# Altium PCB PCB1.PcbDoc
Units mm, origin at the board's own origin, x right, y up, seen from the top; angles counter-clockwise.
Board outline 26 x 58 mm, 2 copper layers (Top Layer, Bottom Layer); 25 components, 58 nets, 176 pads, 88 vias.
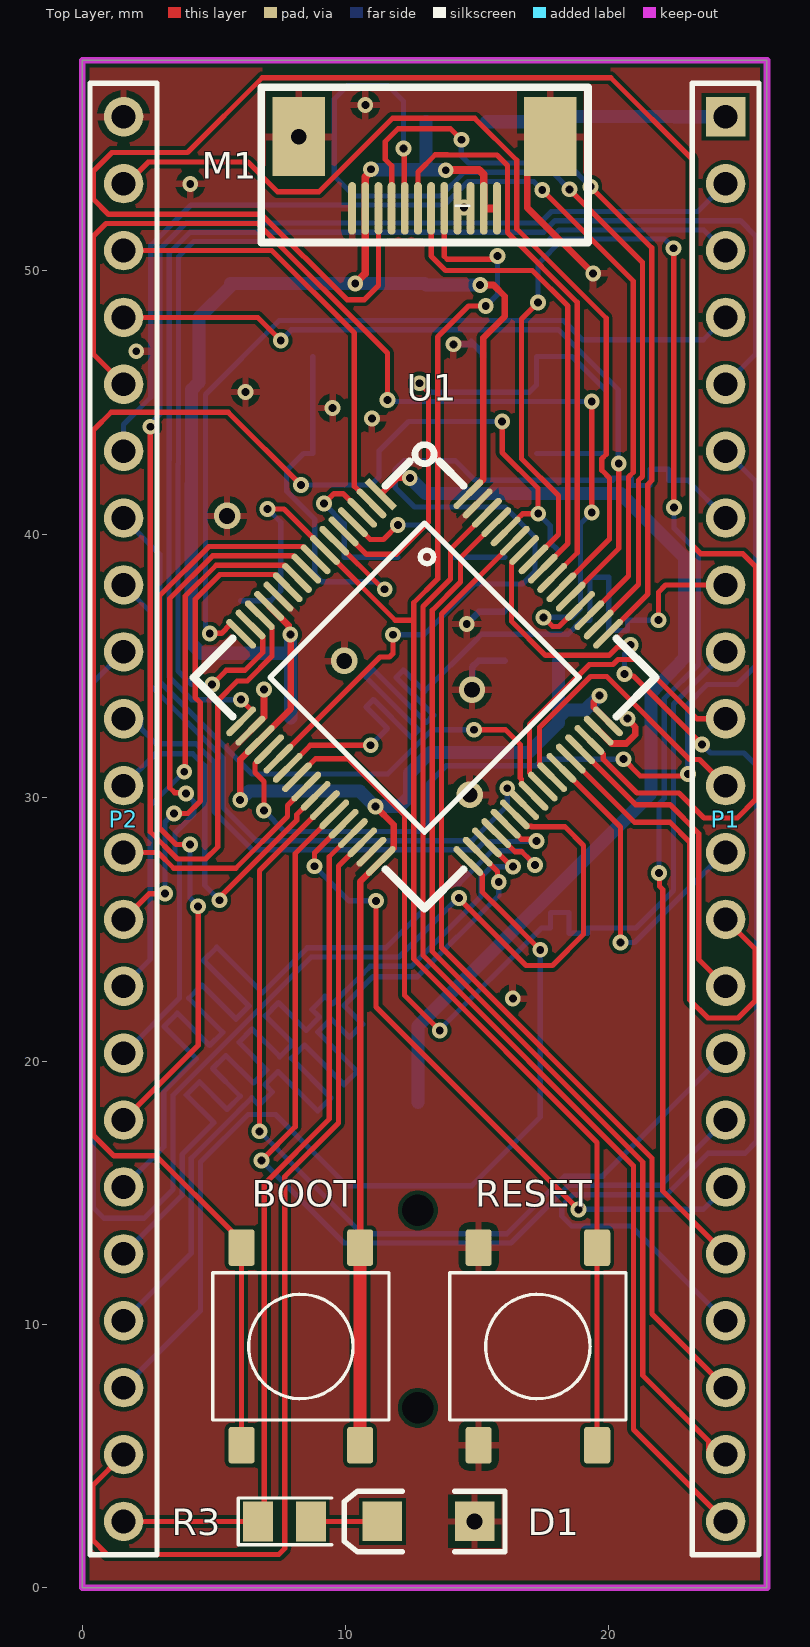
[diagram p0: Top Layer view]
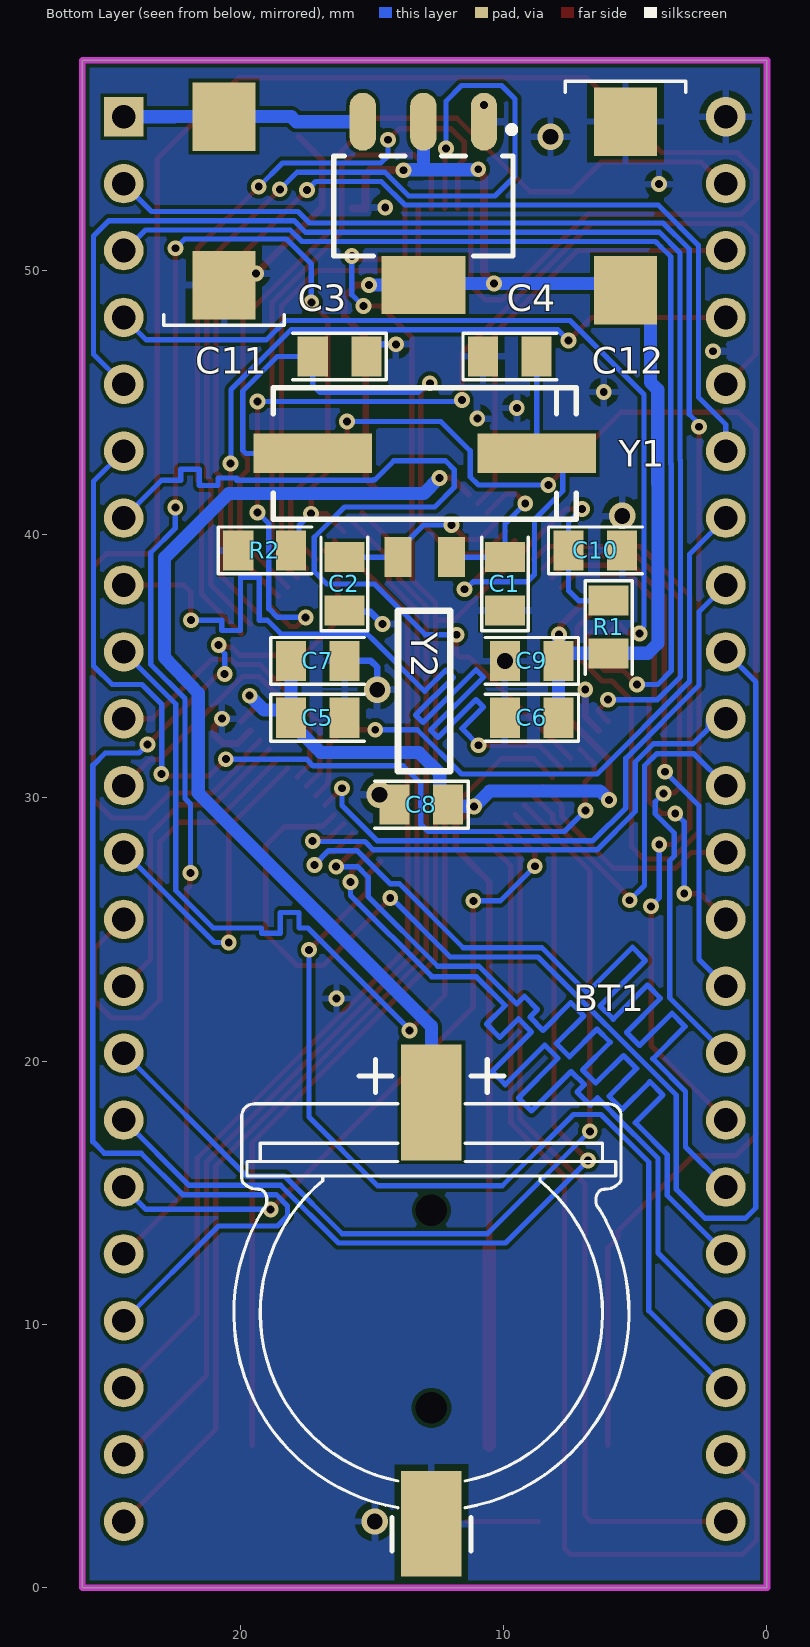
[diagram p1: Bottom Layer view, seen from below]
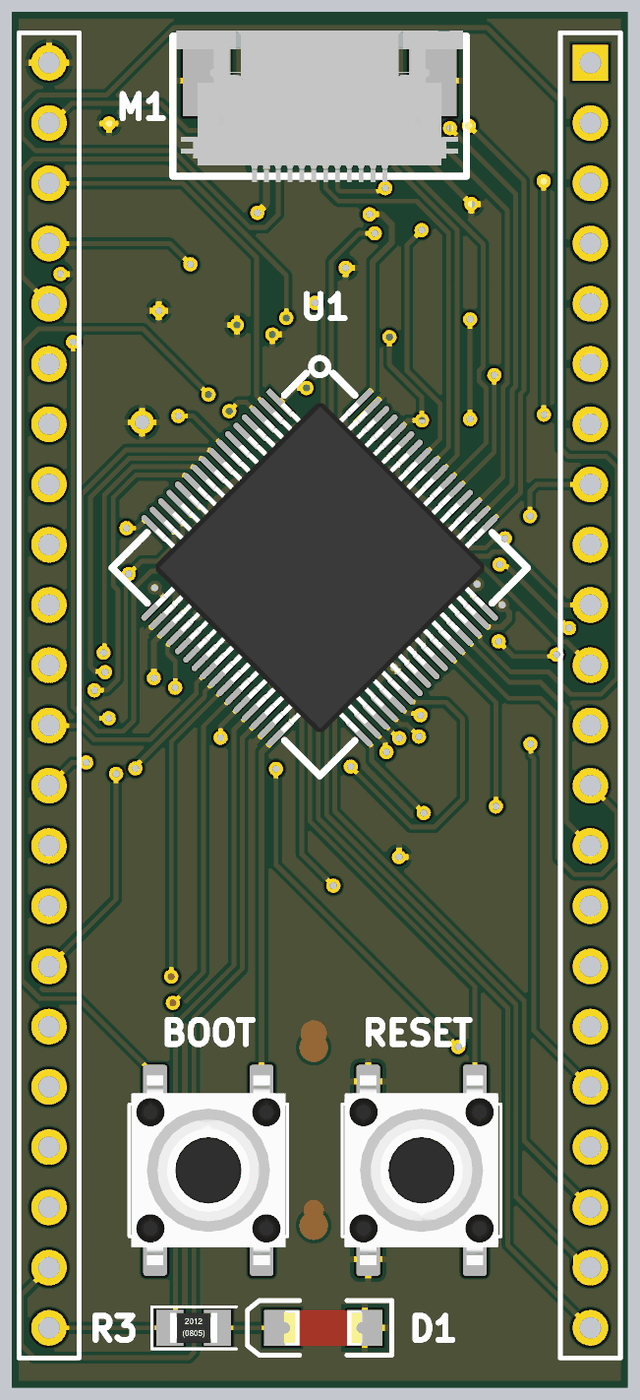
[diagram p2: 3D render of the assembled board from above, using the file's embedded part models]
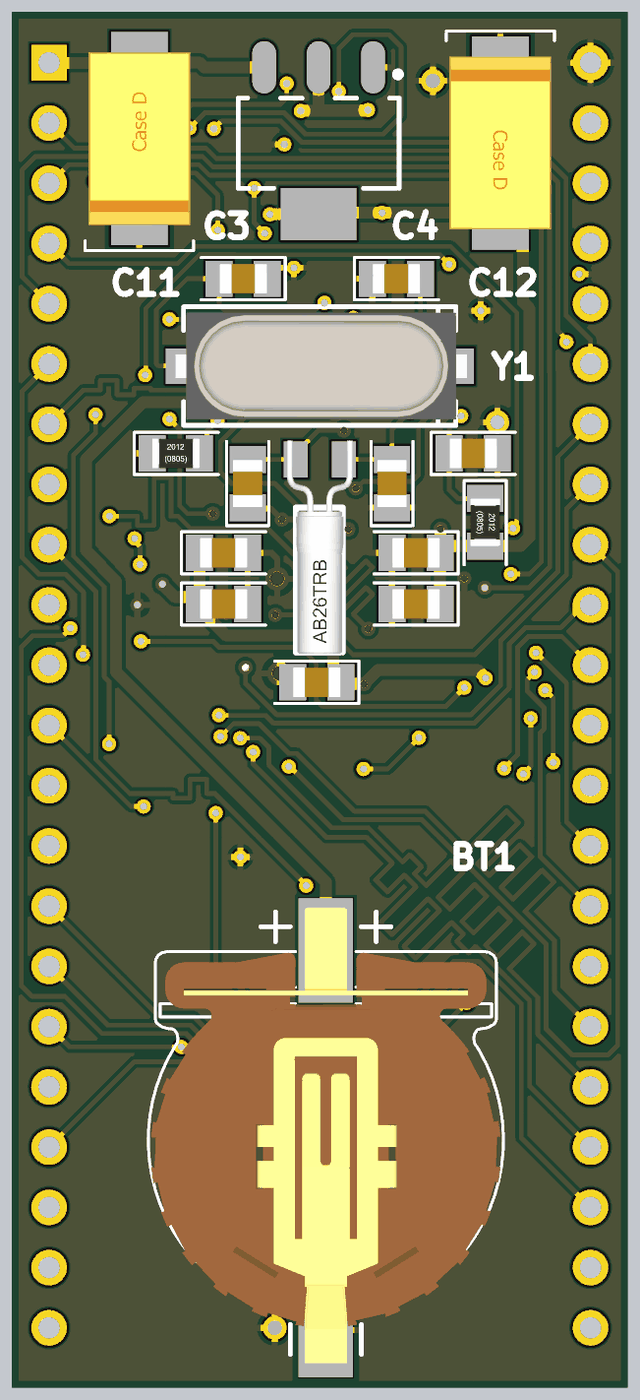
[diagram p3: 3D render of the assembled board from below, using the file's embedded part models]

## Layer stack, top to bottom
Top Solder: solder mask 0.0102, Solder Resist, Dk 3.5
Top Layer: signal copper 0.0356
Dielectric 1: dielectric 0.32, FR-4, Dk 4.8
Bottom Layer: signal copper 0.0356
Bottom Solder: solder mask 0.0102, Solder Resist, Dk 3.5

## Board outline
0,0 0,58 26,58 26,0

## Design rules (kind name [scope] priority, off if disabled: settings)
Clearance [All] p1: gap=0.15 ignorepadtopadclearanceinfootprint=TRUE
MatchedLengths SPI2 [InNetClass('SPI2')] p1: tolerance=25.4 checknetsindiffpair=FALSE checkdiffpairvsdiffpair=TRUE checkxsignals=TRUE checkothers=TRUE usedelayunits=TRUE delaytolerance=5.000000
MatchedLengths [InNetClass('SPI1')] p2: tolerance=25.4 checknetsindiffpair=FALSE checkdiffpairvsdiffpair=TRUE checkxsignals=TRUE checkothers=TRUE usedelayunits=TRUE delaytolerance=5.000000
PolygonConnect [All] p1: connectstyle=Relief reliefconductorwidth=0.254 reliefentries=4 polygonreliefangle="90 Angle" airgapwidth=0.254
RoutingVias [All] p1: holewidth=0.3 width=0.6 viastyle="Through Hole" minholewidth=0.3 minwidth=0.6 maxholewidth=0.7 maxwidth=1.5
SMDNeckDown [All] p1: percent=100.000
SolderMaskExpansion [All] p1: expansion=0.102 istentingtop=FALSE
Width Width_Power [InNetClass('Power')] p1: maxlimit=2 minlimit=0.25 preferedwidth=0.5 minimp=50.000000 maximp=50.000000 favimp=50.000000
Width [All] p2: maxlimit=1 minlimit=0.15 preferedwidth=0.2 minimp=50.000000 maximp=50.000000 favimp=50.000000
30 further rules are at their usual default settings.

## Classes and differential pairs
net class SPI2: PB12 PB13 PB14 PB15
net class SPI1: PA4 PA5 PA6 PA7
net class Power: +3.3v +5v GND NetBT1_1

## Components (designator, comment, footprint, x,y, rotation, side; value= is the part's Value field where it differs from the comment)
BOOT "TS-1143S-WP" TS-1143S 8.298,9.16 r90 top
BT1 "BAT3V3" "Battery socket SMD" 12.743,10.429 r90 bottom
C1 "10pF" "0805 C"#1 9.949,37.1 r90 bottom
C2 "10pF" "0805 C"#1 16.045,37.1 r90 bottom
C3 "22pF" "0805 C"#1 15.215,46.752 r0 bottom
C4 "22pF" "0805 C"#1 10.779,46.752 r180 bottom
C5 "100nF" "0805 C"#1 18.077,33.036 r180 bottom
C6 "100nF" "0805 C"#1 7.917,33.036 r0 bottom
C7 "100nF" "0805 C"#1 18.077,35.195 r180 bottom
C8 "100nF" "0805 C"#1 12.108,29.734 r0 bottom
C9 "100nF" "0805 C"#2 7.917,35.195 r0 bottom
C10 "100nF" "0805 C"#1 7.536,39.386 r180 bottom
C11 "Tantalium Cap" "TANTAL-CAP-Size D" 20.618,52.661 r90 bottom
C12 "Tantalium Cap" "TANTAL-CAP-Size D" 5.376,52.473 r270 bottom
D1 "SMD 1206 LED" "LED 1206" 13.147,2.517 r180 top
M1 "FPC 12 Pin 0.5mm Pitch" "FPC 12 Pin 0.5mm Pitch" 12.997,53.737 r0 top
P1 "MHDR_1X22" HDR1X22#1 24.427,55.857 r270 top
P2 "MHDR_1X22" HDR1X22#2 1.567,2.517 r90 top
R1 "4.7K" "0805 R" 6.012,37.481 r270 bottom
R2 "10K" "0805 R" 20.077,39.386 r180 bottom
R3 "200" "0805 R" 6.679,2.517 r0 top
RESET "TS-1143S-WP" TS-1143S 17.298,9.16 r270 top
U1 "STM32F103RCT6" LQFP-64 12.997,34.56 r315 top
Y1 "16 MHz" "Xtal SMD" 12.997,43.069 r0 bottom
Y2 "11.0592 MHz" "Xtal 32.782khz" 12.997,39.132 r270 bottom

## Footprints (in the part's own frame and the unit in brackets; to place one, negate y for a bottom-side part, rotate by r counter-clockwise, add the part's x,y. Pads: shape width x height; smd on the part's side, far side on the other; paste and mask are expansions set on the pad)
"0805 C"#1 [mil]
  rect 45x60 smd: 1(0,0) 2(80,0)
  silkscreen extent -30,-35 110,35, body extent 1,-25 79,25, height 39
"0805 C"#2 [mil]
  rect 45x60 smd: 1(0,0)
  rect 45x60 smd mask+4: 2(80,0)
  silkscreen extent -30,-35 110,35, body extent 1,-25 79,25, height 39
"0805 R" [mil]
  rect 45x60 smd: 1(0,0) 2(78.74,0)
  silkscreen extent -30,-35 110,35, body extent 0,-25 79,25, height 18
"Battery socket SMD" [mm]
  rect 4.4x2.3 smd mask+0.05: 1(8,0)
  rect 4x2.3 smd mask+0.05: 2(-8,0)
  round 0.5 hole 1.2 unplated mask+0.05: ""(-3.6,0) ""(3.9,0)
  silkscreen extent -9.02,-7.5 9.63,7.5, body extent -9.4,-7.37 9.8,7.37, height 4.25
"FPC 12 Pin 0.5mm Pitch" [mm]
  oval 0.3x2 smd mask+0.04: 1(-2.751,-1.36) 2(-2.251,-1.36) 3(-1.751,-1.36) 4(-1.251,-1.36) 5(-0.751,-1.36) 6(-0.251,-1.36) 7(0.249,-1.36) 8(0.749,-1.36) 9(1.249,-1.36) 10(1.749,-1.36) 11(2.249,-1.36) 12(2.749,-1.36)
  rect 2x3 smd: 13(4.774,1.361) 14(-4.774,1.361)
  silkscreen extent -6.2,-2.66 6.2,3.24, body extent -6.05,-2.91 6.05,3.49, height 2
HDR1X22#1 [mm] "Connector; Header; 22 Position"
  rect 1.5x1.5 hole 0.9: 1(0,0)
  round 1.5 hole 0.9: 2(2.54,0) 3(5.08,0) 4(7.62,0) 5(10.16,0) 6(12.7,0) 7(15.24,0) 8(17.78,0) 9(20.32,0) 10(22.86,0) 11(25.4,0) 12(27.94,0) 13(30.48,0) 14(33.02,0) 15(35.56,0) 16(38.1,0) 17(40.64,0) 18(43.18,0) 19(45.72,0) 20(48.26,0) 21(50.8,0) 22(53.34,0)
  silkscreen extent -1.27,-1.27 54.61,1.27
HDR1X22#2 [mm] "Connector; Header; 22 Position"
  round 1.5 hole 0.9: 1(0,0) 2(2.54,0) 3(5.08,0) 4(7.62,0) 5(10.16,0) 6(12.7,0) 7(15.24,0) 8(17.78,0) 9(20.32,0) 10(22.86,0) 11(25.4,0) 12(27.94,0) 13(30.48,0) 14(33.02,0) 15(35.56,0) 16(38.1,0) 17(40.64,0) 18(43.18,0) 19(45.72,0) 20(48.26,0) 21(50.8,0) 22(53.34,0)
  silkscreen extent -1.27,-1.27 54.61,1.27
"LED 1206" [mm]
  rect 1.5x1.5 smd: 1(-1.75,0) 2(1.75,0)
  silkscreen extent -2.9,-1.15 3.2,1.15, body extent -1.65,-0.72 1.65,0.73, height 1.36
LQFP-64 [mm]
  rect 1.5x0.25 smd mask+0.05: 1(-6.1,3.75)
  oval 1.5x0.25 smd mask+0.05: 2(-6.1,3.25) 3(-6.1,2.75) 4(-6.1,2.25) 5(-6.1,1.75) 6(-6.1,1.25) 7(-6.1,0.75) 8(-6.1,0.25) 9(-6.1,-0.25) 10(-6.1,-0.75) 11(-6.1,-1.25) 12(-6.1,-1.75) 13(-6.1,-2.25) 14(-6.1,-2.75) 15(-6.1,-3.25) 16(-6.1,-3.75) 33(6.1,-3.75) 34(6.1,-3.25) 35(6.1,-2.75) 36(6.1,-2.25) 37(6.1,-1.75) 38(6.1,-1.25) 39(6.1,-0.75) 40(6.1,-0.25) 41(6.1,0.25) 42(6.1,0.75) 43(6.1,1.25) 44(6.1,1.75) 45(6.1,2.25) 46(6.1,2.75) 47(6.1,3.25) 48(6.1,3.75)
  oval 0.25x1.5 smd mask+0.05: 17(-3.75,-6.1) 18(-3.25,-6.1) 19(-2.75,-6.1) 20(-2.25,-6.1) 21(-1.75,-6.1) 22(-1.25,-6.1) 23(-0.75,-6.1) 24(-0.25,-6.1) 25(0.25,-6.1) 26(0.75,-6.1) 27(1.25,-6.1) 28(1.75,-6.1) 29(2.25,-6.1) 30(2.75,-6.1) 31(3.25,-6.1) 32(3.75,-6.1) 49(3.75,6.1) 50(3.25,6.1) 51(2.75,6.1) 52(2.25,6.1) 53(1.75,6.1) 54(1.25,6.1) 55(0.75,6.1) 56(0.25,6.1) 57(-0.25,6.1) 58(-0.75,6.1) 59(-1.25,6.1) 60(-1.75,6.1) 61(-2.25,6.1) 62(-2.75,6.1) 63(-3.25,6.1) 64(-3.75,6.1)
  silkscreen extent -6.36,-6.2 6.2,6.36, body extent -6,-5.98 6,6.02, height 1.7
"TANTAL-CAP-Size D" [mm] "Chip Capacitor, 2-Leads, Body 3.2x1.6mm, IPC High Density, chip Tantalum"
  rect 2.6x2.4 smd: 1(3.199,-0.001) 2(-3.201,-0.001)
  silkscreen extent -4.72,-2.29 -4.32,2.29, body extent -3.65,-2.15 3.65,2.15, height 2.8
TS-1143S [mm] "6.5x6.5mm SMD tact switch 4.3mm stem"
  round 0.508 on Mech15: 0(0,0)
  rrect25% 1.4x1 smd: 1(-3.75,2.25) 1(3.75,2.25) 2(-3.75,-2.25) 2(3.75,-2.25)
  silkscreen extent -2.79,-3.35 2.79,3.35, body extent -4,-3.25 4,3.25, height 4.3
"Xtal 32.782khz" [mil]
  rect 60x40 smd: 1(0,-40) 2(0,40)
  silkscreen extent 80,-40 320,38, body extent -31,-55 323,55, height 79
"Xtal SMD" [mm] "Crystal Oscillator"
  rect 4.5x1.5 smd: 1(-4.25,0) 2(4.25,0)
  silkscreen extent -5.75,-2.5 5.75,2.5, body extent -6.21,-2.25 6.09,2.25, height 5.18

## Part data
BOOT RESET: library part SW_SMD_PB_4.3mm, "Switch SMD Tact 4.3mm Stem", Manufacturer 1=Bond-Tact, Manufacturer Part Number 1=TS-1143S-WP-200, Package / Case="6.5x6.5mm; 4.3mm stem", Function=On/Off, SCDType=spec
BT1: library part "Battry Backup", "Battry Backup", Data=16-12-2016, Designer="Abbas Basereh"
C1 C2 C3 C4 C5 C6 C7 C8 C9 C10: library part "CAP SMD 0805", "CAP 0805", Data=16-12-2016, Desc.="CAP SMD 0805", Designer="Abbas Basereh"
C11 C12: library part "Capacitor Tantalium"
D1: library part "LED SMD 1206"
P1 P2: "Male Header 1X22"
R1 R2 R3: library part "RES 0805 0.125W", "RES 0805", Data=16-12-2016, Desc.="RES SMD 0805", Designer="Abbas Basereh"
U1: library part STM32F103Rxxx
Y1: library part XTAL, "XTAL Crystal", ComponentLink1Description=Datasheet, ComponentLink2Description=Reference, Design Date=2017-1-3, Designer="ABBAS BASEREH", Mounting Technology="Surface Mount\Through-Hole", Status=Unreleased
Y2: library part XTAL_Crystal, "XTAL Crystal", Company="SJ Libraries", ComponentLink1Description=Datasheet, ComponentLink2Description=Reference, Design Date=11/04/2011, Designer="Eng. Saeid Jorablo", HelpURL=http://s3.picofile.com/file/7443264187/Coming_Soon_logo.gif, Mounting Technology="Surface Mount\Through-Hole", Publisher="SJ Unlimited", Status=Unreleased

## Free pads (board coordinates)
  oval 1x2.2 smd far side: 1(10.747,55.667) 2(13.047,55.667) 3(15.347,55.667)
  rect 3.2x2.2 smd far side: 4(13.047,49.467)

## Via types
v1: diameter 0.6, hole 0.3, Top Layer to Bottom Layer, 68 vias
v2: diameter 0.6, hole 0.3, Top Layer to Bottom Layer, tented top, 14 vias
v3: diameter 1, hole 0.6, Top Layer to Bottom Layer, tented top, 3 vias
v4: diameter 1, hole 0.6, Top Layer to Bottom Layer, 3 vias

## Nets (pads, with @x,y where several pads share a name; then routed paths per layer and width w, separated by ;. In a path a pad name is that pad's centre, name@x,y a point inside that pad or via, vN(x,y) a via of type N, cw(c..) or ccw(c..) an arc to the next point about the centre after c; other vN are vias at no path point)
+3.3v: BOOT.2 C5.1 C6.1 C7.1 C8.1 C9.1 C12.1 M1.2 M1.11 M1.12 pad.2 pad.4 R1.2 U1.13 U1.19 U1.32 U1.48 U1.64 | length 106
  Top Layer w0.25: v1(5.995,29.912) 5.999,29.916 5.999,31.451 U1.19 7.917,33.369 7.917,36.183 v2(7.9,36.2) 7.833,36.267 7.833,36.542 U1.13 ; BOOT.2@10.548,12.91 10.548,26.808 U1.32 11.824,28.083 11.824,28.969 v2(11.13,29.663) ; U1.64 15.232,42.098 15.232,47.463 16.045,48.276 16.045,49.038 15.616,49.467 v1(15.108,49.467) ; v2(19.644,33.873) 19.421,33.65 19.421,33.439 U1.48
  Top Layer w0.3: v1(10.365,49.529) 10.746,49.911 M1.2 10.746,53.564 10.965,53.783 v1(10.965,53.864) ; v1(13.8,53.826) 13.811,53.837 15.07,53.837 15.246,53.661 M1.11 15.246,52.365 15.746,52.365 M1.12
  Top Layer w0.5: BOOT.2@10.548,5.41 BOOT.2@10.548,12.91
  Bottom Layer w0.5: v1(5.995,29.912) 5.998,29.912 6.338,30.252 10.536,30.252 11.125,29.663 v2(11.13,29.663) ; v2(7.9,36.2) 7.909,36.191 C9.1@7.909,35.457 ; C6.1 C9.1 7.917,35.449 C9.1@7.909,35.457 ; v1@10.337,49.529 5.632,49.529 5.632,49.429 4.427,48.224 4.427,45.773 4.15,45.496 4.15,41.91 4.139,41.899 4.139,35.861 4.519,35.481 R1.2 7.885,35.481 C9.1@7.909,35.457 ; v1(10.365,49.529) 12.985,49.529 pad.4 v1(15.108,49.467) ; v1(10.965,53.864) 10.984,53.845 13.047,53.845 13.049,53.843 13.783,53.843 v1(13.8,53.826) ; v2@11.141,29.674 12.048,29.674 C8.1 12.43,30.055 12.43,30.929 13.215,31.715 16.947,31.715 18.077,32.845 C5.1 ; 13.047,53.864 pad.2 ; C7.1 C5.1 ; v2@19.625,33.854 19.106,33.334 18.375,33.334 C5.1
+5v: C11.1 P1.1 pad.3 | length 9.2
  Bottom Layer w0.5: pad.3 17.874,55.667 18.066,55.86 C11.1 22.497,55.86 22.5,55.857 P1.1
BOOT0: BOOT.1 R2.2 U1.60 | length 67.7
  Top Layer w0.2: BOOT.1@6.048,5.41 6.048,12.91 5.663,13.295 5.663,13.545 2.809,16.399 1.201,16.399 0.424,17.176 0.424,43.958 1.101,44.635 5.538,44.635 v1(8.304,41.869) ; v1(15.943,44.288) 15.943,43.112 17.308,41.748 17.308,40.79 v1(17.315,40.783) 16.729,40.783 16.668,40.722 16.476,40.514 16.473,40.511 U1.60
  Bottom Layer w0.2: v1(8.304,41.869) 10.959,41.869 11.27,42.18 11.27,43.17 12.388,44.288 v1(15.943,44.288) ; v1(17.315,40.783) 17.767,40.331 17.767,39.696 R2.2
GND: BT1.2 C1.1 C2.1 C3.1 C4.1 C5.2 C6.2 C7.2 C8.2 C9.2 C10.2 C11.2 C12.2 D1.1 M1.1 M1.9 M1.10 M1.13 M1.14 P2.22 pad.1 R2.1 RESET.2 U1.12 U1.18 U1.31 U1.47 U1.63 | length 16.2
  Top Layer w0.25: U1.18 6.9,33.059 v2(6.9,34.112) ; M1.13 16.896,54.223 16.896,53.318 16.892,53.314 16.892,52.408 v1(19.4,49.9) ; U1.47 20.097,32.056 20.656,32.056 21,32.4 21,32.679 20.7,32.979 v2(20.7,33)
  Bottom Layer w0.25: v1(14.091,47.214) 14.768,47.214 14.768,47.309 15.215,46.863 C3.1 ; v2(14.6,36.6) 15.054,37.054 15.999,37.054 C2.1 ; v3(14.8,34.1) 14.8,34.956 15.039,35.195 C7.2
  other v1: 16.349,22.371 11,44.4 9.5,44.8 6.2,45.4 2.05,46.95 14.494,52.413 4.1,53.3 10.747,56.3
  other v3: 14.711,30.108 9.949,35.195
  other v4: 14.897,2.517 5.5,40.7 8.223,55.098
JTCK: M1.4 U1.49 | length 30.5
  Top Layer w0.2: M1.4 11.746,53.997 11.5,54.243 11.5,54.905 11.995,55.4 13.976,55.4 v1(14.394,54.982) ; v1(19.3,53.2) 21.622,50.878 21.622,42.042 21.475,41.895 21.475,37.735 U1.49
  Bottom Layer w0.2: v1(14.394,54.982) 14.394,54.372 14.666,54.1 18.4,54.1 v1(19.3,53.2)
JTDI: M1.5 U1.50 | length 38.3
  Top Layer w0.2: v1(12.193,54.65) 12.227,54.617 12.227,52.396 M1.5 ; v1(18.5,53.1) 21.272,50.328 21.272,42.2 21.125,42.053 21.125,38.092 U1.50
  Bottom Layer w0.2: v1(12.193,54.65) 12.193,56.446 11.6,57.039 10.075,57.039 9.568,56.532 9.568,53.61 10.327,52.851 13.604,52.851 14.503,53.75 17.85,53.75 v1(18.5,53.1)
JTDO: M1.6 U1.55 | length 22.4
  Top Layer w0.2: M1.6 12.746,53.756 13.404,54.414 13.86,54.414 15.743,54.407 16.146,54.004 16.146,51.459 18.797,48.808 18.797,39.299 U1.55
JTMS: M1.3 U1.46 | length 76.3
  Top Layer w0.2: M1.3 11.246,49.446 10.711,48.911 10.05,48.911 6.81,52.151 0.994,52.151 0.424,52.721 0.424,53.8 1.122,54.499 3.997,54.499 6.834,57.337 20.065,57.337 23.157,54.245 23.157,39.589 23.487,39.259 25.092,39.259 25.57,38.781 25.57,29.924 24.871,29.226 23.609,29.226 22.662,30.173 21.061,30.173 19.785,31.449 19.785,31.647 19.255,32.178 U1.46
JTRST: M1.7 U1.56 | length 18.2
  Top Layer w0.2: M1.7 13.246,50.566 13.79,50.022 17.088,50.022 18.438,48.672 18.438,39.648 U1.56
NetBT1_1: BT1.1 U1.1 | length 37.9
  Top Layer w0.25: U1.1 11.954,42.144 v1(12.438,42.144)
  Bottom Layer w0.5: v1(12.438,42.144) 13.037,41.545 20.448,41.545 22.876,39.117 22.876,35.325 21.599,33.972 21.599,30.174 12.743,21.319 BT1.1
NetC1_2: C1.2 U1.3 Y2.2 | length 6.3
  Top Layer w0.2: v1(9.179,41.169) 9.555,41.545 9.901,41.545 U1.3
  Bottom Layer w0.2: v1(9.179,41.169) 9.949,40.399 C1.2 Y2.2
NetC2_2: C2.2 U1.4 Y2.1 | length 6.9
  Top Layer w0.2: U1.4 10.933,39.806 11.436,39.806 v2(11.981,40.351)
  Bottom Layer w0.2: v2(11.981,40.351) 13.048,40.351 14.013,39.386 Y2.1 C2.2
NetC3_2: C3.2 U1.5 Y1.2 | length 23.5
  Top Layer w0.2: U1.5 10.793,39.239 11.924,39.239 13.143,40.458 13.143,45.396 v1(12.803,45.736)
  Bottom Layer w0.2: v1(12.803,45.736) 12.911,45.736 13.257,45.39 16.969,45.39 17.247,45.668 C3.2 18.598,46.752 19.906,45.444 19.906,43.186 19.789,43.069 Y1.2
NetC4_2: C4.2 U1.6 Y1.1 | length 14.9
  Top Layer w0.2: U1.6 9.581,39.757 11.426,37.913 v2(11.483,37.913)
  Bottom Layer w0.2: C4.2 Y1.1 8.404,43.069 7.754,42.419 7.754,41.642 8.831,40.564 8.831,38.469 9.1,38.2 11.166,38.2 11.453,37.913 v2(11.483,37.913)
NetD1_2: D1.2 R3.2 | length 2.7
  Top Layer w0.2: R3.2 D1.2
NRST: C10.1 M1.8 R1.1 RESET.1 U1.7 | length 66
  Top Layer w0.2: v1(7.03,40.963) 7.655,40.963 U1.7 11.882,36.736 12.587,36.736 ; M1.8 13.746,50.561 13.863,50.444 15.529,50.444 15.657,50.572 v1(15.766,50.572) ; v1(15.321,48.667) 14.671,48.667 13.493,47.489 13.493,38.309 12.587,37.403 12.587,36.736 ; RESET.1@19.548,5.41 19.548,12.91 19.548,16.909 12.587,23.869 12.587,36.736
  Bottom Layer w0.2: R1.1 7.155,37.481 7.536,37.862 7.536,40.457 v1(7.03,40.963) ; v1(15.321,48.667) 15.331,48.667 15.766,49.102 v1(15.766,50.572)
PA0: P1.2 U1.14 | length 58
  Top Layer w0.2: v1(2.583,44.085) 2.583,28.705 3.617,27.671 4.686,27.671 5.148,28.134 5.148,33.696 5.885,34.433 6.266,34.433 7.206,35.373 7.206,36.427 7.191,36.442 7.191,36.477 U1.14
  Bottom Layer w0.2: v1(2.583,44.085) 2.583,44.193 2.95,44.561 2.95,50.828 3.944,51.822 17.374,51.822 17.812,52.26 23.37,52.26 P1.2
PA1: P1.3 U1.15 | length 42.4
  Top Layer w0.2: v1(4.932,34.301) 5.471,34.84 6.178,34.84 6.85,35.512 6.85,36.111 U1.15
  Bottom Layer w0.2: v1(4.932,34.301) 4.149,34.301 3.639,34.812 3.639,42.669 3.65,42.681 3.65,50.538 4.032,50.92 4.234,51.122 17.664,51.122 18.102,51.56 23.598,51.56 24.381,50.777 P1.3
PA2: P1.4 U1.16 | length 32.2
  Top Layer w0.2: v1(4.839,36.235) 4.844,36.24 5.282,36.24 5.631,36.59 5.664,36.59 U1.16
  Bottom Layer w0.2: v1(4.839,36.235) 4.839,36.343 4.675,36.507 4.675,45.313 7.479,48.117 15.549,48.117 15.55,48.118 18.27,48.118 19.001,47.387 23.577,47.387 P1.4
PA3: P1.5 U1.17 | length 49.5
  Top Layer w0.2: U1.17 6.422,33.288 6.422,33.32 6.032,33.71 v2(6.032,33.722)
  Bottom Layer w0.2: v2(6.032,33.722) 4.158,33.722 3.289,34.591 3.289,42.814 3.3,42.826 3.3,50.683 4.089,51.472 17.519,51.472 17.957,51.91 24.99,51.91 25.57,51.33 25.57,46.84 P1.5
PA4: P1.6 U1.20 | length 35.9
  Top Layer w0.2: v1(6.893,29.508) 6.901,29.516 6.901,30.615 6.562,30.954 6.562,31.294 7.093,31.824 U1.20 ; v1(20.55,31.462) 21.186,30.826 22.922,30.826 v1(22.999,30.903)
  Bottom Layer w0.2: v1(6.893,29.508) 7.683,28.718 12.87,28.718 13.147,28.995 13.147,30.54 13.814,31.207 17.233,31.207 17.488,31.462 v1(20.55,31.462) ; v1(22.999,30.903) 22.979,30.922 22.979,33.544 23.73,34.295 24.86,34.295 25.57,35.004 25.57,42.014 P1.6
PA5: P1.7 U1.21 | length 36.2
  Top Layer w0.2: U1.21 11.306,35.343 11.669,35.343 11.795,35.469 v2(11.795,36.186)
  Bottom Layer w0.2: v2(11.795,36.186) 12.972,36.186 14.902,38.116 16.716,38.116 17.192,38.592 17.192,39.89 16.045,41.037 12.616,41.037 11.879,41.774 11.879,42.459 12.214,42.794 14.169,42.794 14.893,42.069 14.944,42.069 14.96,42.053 20.039,42.053 20.139,42.053 20.139,42.138 20.847,42.138 20.847,41.853 21.555,41.853 21.555,42.47 22.263,42.47 22.263,42.053 22.756,42.053 22.991,42.053 P1.7
PA6: P1.8 U1.22 | length 36.2
  Top Layer w0.2: U1.22 8.659,31.99 v2(10.95,31.99) ; v1(21.877,36.74) 21.877,37.802 22.151,38.077 P1.8
  Bottom Layer w0.2: v2(10.95,31.99) 11.586,32.626 10.771,33.442 11.053,33.725 12.492,32.287 12.774,32.569 10.771,34.573 11.053,34.856 13.059,32.851 13.341,33.134 11.909,34.567 12.191,34.849 13.001,34.04 14.91,35.95 15.167,36.207 18.441,36.207 18.974,36.74 19.183,36.74 19.283,36.74 19.283,38.374 19.991,38.374 19.991,36.35 20.699,36.35 20.699,36.74 21.864,36.74 v1(21.877,36.74)
PA7: P1.9 U1.23 | length 36.6
  Top Layer w0.2: U1.23 8.856,31.479 10.091,31.479 12.237,29.333 12.237,22.498 v1(13.575,21.161)
  Bottom Layer w0.2: v1(13.575,21.161) 13.575,21.193 17.433,25.052 17.675,25.052 17.775,25.052 17.775,25.644 18.483,25.644 18.483,24.847 19.191,24.847 19.191,25.052 20.788,25.052 21.028,25.052 22.449,26.473 22.449,33.558 P1.9
PA8: P1.10 U1.41 | length 12
  Top Layer w0.2: U1.41 17.487,30.437 16.979,30.945 16.979,32.779 19.255,35.055 20.15,35.055 20.345,35.25 21.094,35.25 23.347,32.997 P1.10
PA9: P1.11 U1.42 | length 12
  Top Layer w0.2: U1.42 17.366,31.252 17.366,32.671 19.295,34.6 19.915,34.6 23.062,31.453 23.431,31.453 24.002,30.881 24.355,30.881 24.427,30.953 24.427,30.881 P1.11
PA10: P1.12 U1.43 | length 13
  Top Layer w0.2: U1.43 20.439,28.886 v1(20.439,24.502)
  Bottom Layer w0.2: v1(20.439,24.502) 20.973,24.502 24.388,27.917 P1.12
PA11: P1.13 U1.44 | length 18.4
  Top Layer w0.2: U1.44 20.967,29.065 22.319,29.065 23.061,28.323 23.061,22.324 23.755,21.631 24.896,21.631 25.541,22.276 25.541,24.262 P1.13
PA12: P1.14 U1.45 | length 12.1
  Top Layer w0.2: U1.45 19.505,31.234 21.003,29.735 22.317,29.735 23.411,28.642 23.411,23.853 P1.14
PB0: P1.15 U1.26 | length 35.6
  Top Layer w0.2: v1(6.728,17.331) 6.728,27.231 U1.26
  Bottom Layer w0.2: v1(6.728,17.331) 10.619,13.44 16.13,13.44 18.32,15.629 19.759,15.629 P1.15
PB1: P1.16 U1.27 | length 35.1
  Top Layer w0.2: v1(6.799,16.221) 8.086,17.508 8.086,27.881 U1.27
  Bottom Layer w0.2: v1(6.799,16.221) 9.931,13.09 16.275,13.09 18.465,15.279 21.949,15.279 P1.16
PB2: P1.17 U1.28 | length 25.8
  Top Layer w0.2: v1(8.815,27.397) 8.815,27.903 U1.28 ; v1(11.151,26.082) 11.151,24.491 11.151,22.055 v1(18.847,14.359)
  Bottom Layer w0.2: v1(8.815,27.397) 10.13,26.082 v1(11.151,26.082) ; v1(18.847,14.359) 18.855,14.367 23.577,14.367 P1.17
PB5: P1.18 U1.57 | length 59
  Top Layer w0.2: U1.57 18.083,39.999 18.083,41.468 16.68,42.871 16.68,48.178 v1(17.302,48.8) ; v1(21.895,27.135) 21.915,27.115 21.915,26.636 22.039,26.512 22.039,15.064 P1.18 ; v1(22.455,50.863) 22.461,50.858 22.461,41.028 v1(22.467,41.022)
  Bottom Layer w0.2: v1(17.302,48.8) 17.302,50.266 18.247,51.21 22.108,51.21 v1(22.455,50.863) ; v1(21.895,27.135) 21.895,29.764 22.099,29.967 22.099,33.759 23.4,35.06 23.4,39.3 22.467,40.233 v1(22.467,41.022) ; P1.18 P1.18@25.087,12.677
PB6: P1.19 U1.58 | length 46.7
  Top Layer w0.2: U1.58 16.78,39.39 16.299,38.909 16.299,36.701 17.595,35.405 20.005,35.405 20.324,35.724 20.744,35.724 v1(20.82,35.8) ; v1(20.593,34.7) 20.669,34.624 20.925,34.624 v1(23.529,32.02)
  Bottom Layer w0.2: v1(20.593,34.7) 20.593,35.465 20.82,35.692 v1(20.82,35.8) ; v1(23.529,32.02) 23.851,31.699 25.129,31.699 25.6,31.228 25.6,16.937 25.163,16.5 23.766,16.5 22.192,14.926 18.636,14.926 18.204,14.494 18.204,14.113 18.585,13.732 20.832,13.732 P1.19
PB7: P1.20 U1.59 | length 37.8
  Top Layer w0.2: U1.59 13.637,36.968 13.637,24.304 21.633,16.309 21.633,10.391 P1.20
PB8: P1.21 U1.61 | length 41.4
  Top Layer w0.2: U1.61 14.364,39.109 14.364,38.19 13.287,37.113 13.287,24.159 21.283,16.164 21.283,8.062 23.792,5.553 23.792,5.057 P1.21
PB9: P1.22 U1.62 | length 44.1
  Top Layer w0.2: U1.62 13.981,39.433 13.981,38.301 12.937,37.258 12.937,24.014 20.933,16.019 20.933,6.011 P1.22
PB10: P2.1 R3.1 U1.29 | length 32.7
  Top Layer w0.2: P2.1 R3.1 6.913,2.751 6.913,15.334 9.376,17.797 9.376,27.757 U1.29
PB11: P2.2 U1.30 | length 39.4
  Top Layer w0.2: P2.2 0.4,3.89 0.4,1.8 0.939,1.261 7.461,1.261 7.688,1.488 7.688,15.614 9.726,17.652 9.726,27.4 U1.30
PB12: P2.3 U1.33 | length 36.5
  Top Layer w0.2: U1.33 14.659,27.581 15.189,27.051 15.189,26.424 15.881,25.733 v1(17.391,24.222)
  Bottom Layer w0.2: P2.3 4.491,10.521 4.491,16.162 6.302,17.973 7.343,17.973 10.051,15.265 14.784,15.265 17.391,17.872 v1(17.391,24.222)
PB13: P2.4 U1.34 | length 36.3
  Top Layer w0.2: U1.34 15.766,27.195 15.766,26.845 v1(15.816,26.795)
  Bottom Layer w0.2: P2.4 4.141,12.711 4.141,16.307 5.864,18.03 5.935,18.101 6.436,18.602 6.714,18.323 7.215,18.824 6.936,19.102 7.437,19.603 8.939,18.101 9.439,18.602 7.937,20.104 8.438,20.604 9.94,19.102 10.441,19.603 8.939,21.105 9.439,21.605 10.146,20.899 10.646,21.4 9.94,22.106 11.026,23.192 11.036,23.203 12.727,23.203 15.816,26.291 v1(15.816,26.795)
PB14: P2.5 U1.35 | length 36.3
  Top Layer w0.2: U1.35 15.379,28.302 16.302,27.379 v1(16.359,27.379)
  Bottom Layer w0.2: P2.5 3.791,14.901 3.791,16.452 4.928,17.589 4.999,17.66 3.947,18.711 4.448,19.211 5.499,18.16 6,18.661 4.949,19.712 5.449,20.213 6.5,19.162 7.001,19.662 5.95,20.713 6.451,21.214 7.502,20.163 8.002,20.663 6.951,21.715 7.452,22.215 8.503,21.164 9.004,21.665 8.711,21.957 9.211,22.458 9.504,22.165 10.671,23.332 10.939,23.601 12.501,23.601 15.144,26.244 15.144,26.979 15.545,27.379 v1(16.359,27.379)
PB15: P2.6 U1.36 | length 36.1
  Top Layer w0.2: U1.36 16.429,27.946 16.69,27.946 v1@17.014,27.622
  Bottom Layer w0.2: P2.6 3.091,16.741 3.091,18.844 4.263,20.017 4.334,20.087 3.108,21.313 3.609,21.813 4.835,20.588 5.335,21.089 4.042,22.382 4.542,22.883 5.836,21.589 6.336,22.09 4.609,23.817 5.11,24.318 6.837,22.591 8.336,24.09 8.547,24.301 11.532,24.301 13.966,26.735 14.316,26.735 15.568,27.987 16.649,27.987 v1(17.188,27.448)
PC0: P2.7 U1.8 | length 28.9
  Top Layer w0.2: P2.7 4.399,20.589 v1(4.399,25.873) ; v1(4.091,28.221) 3.562,28.221 2.933,28.85 2.933,37.665 4.806,39.538 8.372,39.538 U1.8
  Bottom Layer w0.2: v1(4.091,28.221) 4.091,26.19 4.399,25.882 v1(4.399,25.873)
PC1: P2.8 U1.9 | length 25.2
  Top Layer w0.2: v1(3.932,30.163) 3.906,30.189 3.511,30.189 3.321,30.379 3.321,37.558 4.946,39.183 8.021,39.183 U1.9
  Bottom Layer w0.2: P2.8 1.597,20.297 3.692,22.391 3.692,27.614 3.523,27.783 3.523,28.662 4.243,29.382 4.243,29.845 3.932,30.156 v1(3.932,30.163)
PC2: P2.9 U1.10 | length 20.7
  Top Layer w0.2: v1(3.871,30.983) 3.905,31.017 3.905,37.647 5.085,38.827 7.669,38.827 U1.10
  Bottom Layer w0.2: P2.9 2.583,23.853 2.583,29.694 v1(3.871,30.983)
PC3: P2.10 U1.11 | length 18.2
  Top Layer w0.2: P2.10 2.546,26.356 v1(3.142,26.356) ; v1(3.483,29.4) 4.003,29.4 4.482,29.879 4.482,33.607 4.285,33.804 4.285,37.532 5.225,38.472 7.318,38.472 U1.11
  Bottom Layer w0.2: v1(3.142,26.356) 3.142,29.083 3.459,29.4 v1(3.483,29.4)
PC4: P2.11 U1.24 | length 8.7
  Top Layer w0.2: P2.11 2.876,27.917 3.472,27.321 5.829,27.321 7.79,29.282 7.79,29.707 U1.24
PC5: P2.12 U1.25 | length 14.6
  Top Layer w0.2: v1(5.215,26.106) 5.215,26.212 8.14,29.137 8.14,29.349 U1.25
  Bottom Layer w0.2: P2.12 2.775,31.664 4.197,31.664 4.65,31.211 4.65,26.67 v1(5.215,26.106)
PC6: P2.13 U1.37 | length 20.7
  Top Layer w0.2: U1.37 16.086,29.009 16.67,28.426 17.176,28.426 v1(17.252,28.349)
  Bottom Layer w0.2: P2.13 2.227,32.997 2.227,32.63 2.81,32.047 4.309,32.047 5.005,31.352 5.005,29.471 6.458,28.018 14.951,28.018 15.27,28.337 17.24,28.337 v1(17.252,28.349)
PC7: P2.14 U1.38 | length 55.5
  Top Layer w0.2: v1(14.308,26.185) 14.308,26.175 16.852,23.631 17.852,23.631 19.036,24.814 19.036,28.182 18.318,28.899 17.067,28.899 17.055,28.911 16.878,28.911 U1.38
  Bottom Layer w0.2: P2.14 0.424,34.394 0.424,14.426 0.821,14.03 2.347,14.03 3.441,15.123 3.441,18.699 8.692,23.951 12.026,23.951 14.261,26.185 v1(14.308,26.185)
PC8: P2.15 U1.39 | length 23.4
  Top Layer w0.2: v2(16.137,30.359) U1.39
  Bottom Layer w0.2: P2.15 2.583,37.061 2.583,34.268 5.359,31.492 5.359,29.612 6.603,28.368 14.806,28.368 16.137,29.699 v2(16.137,30.359)
PC9: P2.16 U1.40 | length 25
  Top Layer w0.2: v2(14.877,32.579) 16.07,32.579 16.629,32.02 16.629,30.751 16.682,30.698 16.682,30.521 U1.40
  Bottom Layer w0.2: P2.16 2.939,39.245 2.939,34.408 6.446,30.9 11.6,30.9 13.279,32.579 v2(14.877,32.579)
PC10: P2.17 U1.51 | length 42.5
  Top Layer w0.2: v1(17.467,53.076) 20.922,49.621 20.922,42.358 20.74,42.176 20.74,38.413 U1.51
  Bottom Layer w0.2: P2.17 1.567,44.17 2.6,45.204 2.6,50.973 4.128,52.501 13.749,52.501 14.648,53.4 17.143,53.4 v1(17.467,53.076)
PC11: P2.18 U1.52 | length 40.5
  Top Layer w0.2: P2.18 0.424,46.84 0.424,51.324 0.901,51.801 6.665,51.801 11.586,46.88 v1(11.586,45.101) ; v2(17.518,36.846) 17.864,36.5 18.105,36.5 18.888,37.282 U1.52 ; v1(19.347,40.834) v1(19.347,45.04)
  Bottom Layer w0.2: v1(11.586,45.101) 11.647,45.04 v1(19.347,45.04) ; v2(17.518,36.846) 18.585,36.846 18.915,37.176 18.915,40.402 v1(19.347,40.834)
PC12: P2.19 U1.53 | length 28.9
  Top Layer w0.2: P2.19 6.661,48.237 v1(7.536,47.362) ; U1.53 20.372,39.46 v1(20.372,42.688)
  Bottom Layer w0.2: v1(7.536,47.362) 7.938,47.764 16.549,47.764 16.553,47.768 18.077,47.768 20.35,45.495 20.35,42.71 v1(20.372,42.688)
PC13: P2.20 U1.2 | length 16.8
  Top Layer w0.2: P2.20 7.194,50.777 10.33,47.641 10.33,41.823 U1.2
PD2: P2.21 U1.54 | length 36.1
  Top Layer w0.2: P2.21 1.684,53.317 2.508,54.141 6.289,54.141 7.419,53.01 8.989,53.01 11.779,55.8 14.9,55.8 16.496,54.204 16.496,51.604 19.897,48.203 19.897,43.042 19.728,42.873 19.728,42.434 20.022,42.14 20.022,39.817 U1.54
pads on no net: BOOT.0 BT1. RESET.0

## Polygon pours and split planes (outlines as drawn)
GND on Bottom Layer "GND_L02_P001" (solid, pour order 1): 0.043,58 25.951,58 25.951,0.016 0.043,0.016
GND on Top Layer "GND_L01_P000" (solid, pour order 0): 0.043,58 25.951,58 25.951,0.016 0.043,0.016

## Keep-outs
Keep-Out Layer:
  the board outline again, w0.254

## Silkscreen, mask and mechanical layers (free items; w line width, h text height)
Top Overlay:
  lines w0.1: 14.193,52.472 14.693,52.472
Bottom Overlay:
  circle w0.25: c9.697,55.367 r0.125
  lines w0.2: 10.047,54.367 9.647,54.367 9.647,50.567 11.147,50.567 ; 11.447,54.367 12.347,54.367 ; 13.747,54.367 14.647,54.367 ; 14.947,50.567 16.447,50.567 16.447,54.367 16.047,54.367
Mechanical 13:
  lines w0.1: 9.747,50.667 9.747,54.267 16.347,54.267 16.347,50.667 9.747,50.667
Mechanical 15:
  lines w0.1: 12.547,52.467 13.547,52.467 ; 13.047,51.967 13.047,52.967 ; 9.297,48.217 9.297,56.967 16.797,56.967 16.797,48.217 9.297,48.217